# Altium PCB dym.PcbDoc
Units mm, origin at the board's own origin, x right, y up, seen from the top; angles counter-clockwise.
Board outline 40 x 20 mm, 2 copper layers (Top Layer, Bottom Layer); 20 components, 11 nets, 45 pads, 3 vias.
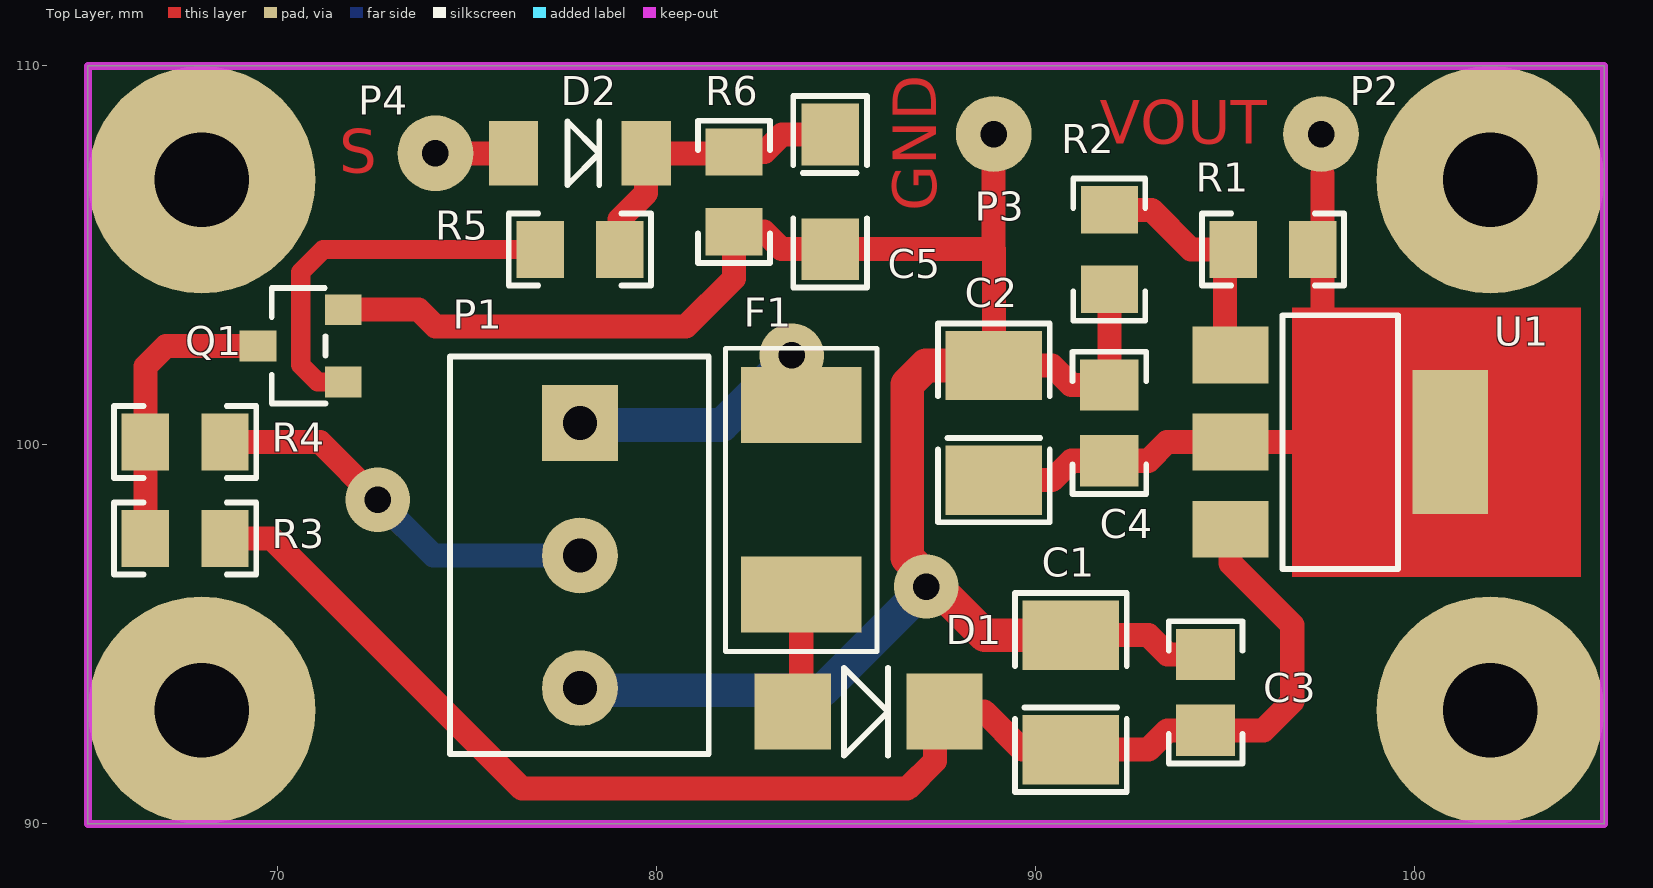
[diagram p0: Top Layer view]
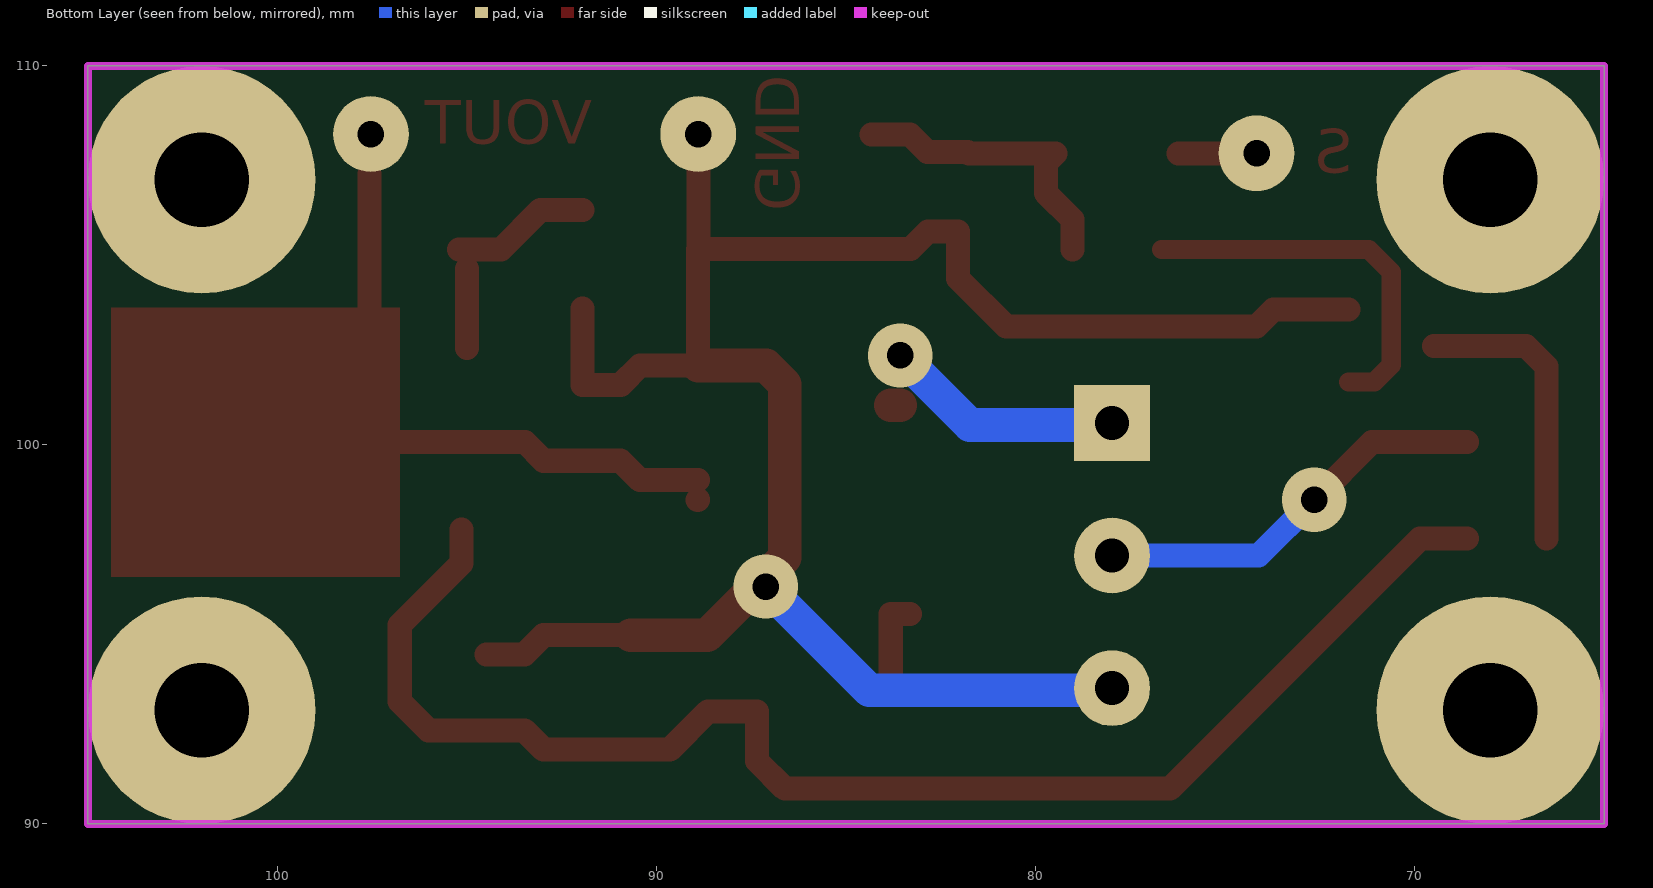
[diagram p1: Bottom Layer view, seen from below]

## Layer stack, top to bottom
Top Layer: signal copper 0.0356
Dielectric: dielectric 0.32, FR-4, Dk 4.8
Bottom Layer: signal copper 0.0356

## Board outline
65,90 105,90 105,110 65,110

## Design rules (kind name [scope] priority, off if disabled: settings)
Clearance [All] p1: gap=0.254
PolygonConnect [All] p1: connectstyle=Relief reliefconductorwidth=0.254 reliefentries=4 polygonreliefangle="90 Angle" airgapwidth=0.254
RoutingVias [All] p1: holewidth=0.7 width=1.6 viastyle="Through Hole" minholewidth=0.7 minwidth=1.6 maxholewidth=0.7 maxwidth=1.6
SolderMaskExpansion [All] p1: expansion=0.102
Width [All] p1: maxlimit=0.889 minlimit=0.508 preferedwidth=0.762 minimp=50.000000 maximp=50.000000 favimp=50.000000
28 further rules are at their usual default settings.

## Components (designator, comment, footprint, x,y, rotation, side; value= is the part's Value field where it differs from the comment)
C1 "10uF" TANC_B 90.932,93.472 r90 top
C2 "10uF" TANC_B 88.9,100.584 r90 top
C3 "100nF" C0805 94.488,93.472 r90 top
C4 "100nF" C0805 91.948,100.584 r90 top
C5 "1uF" TANC_A 84.582,106.68 r270 top
D1 "M4" SMA 85.598,92.964 r180 top
D2 "1N4148" DO-213A 77.978,107.696 r180 top
F1 "0679-0500-01" 0679-0500-01 83.82,98.552 r270 top
P1 "ARK 3-Pin" ARK-3.5mm-3pin 77.978,100.584 r270 top
P2 "2.5V" PAD 97.536,108.204 r0 top
P3 "GND" PAD 88.9,108.204 r0 top
P4 "SIG" PAD 74.168,107.696 r0 top
Q1 "2N7002" SOT23 70.612,102.616 r90 top
R1 "150R" R0805 96.266,105.156 r180 top
R2 "1K" R0805 91.948,105.156 r270 top
R3 "10K" R0805 67.564,97.536 r180 top
R4 "100R" R0805 67.564,100.076 r180 top
R5 "100R" R0805 77.978,105.156 r0 top
R6 "1M" R0805 82.042,106.68 r90 top
U1 "LD1117S-TR" SOT-223 98.044,100.076 r180 top

## Footprints (in the part's own frame and the unit in brackets; to place one, negate y for a bottom-side part, rotate by r counter-clockwise, add the part's x,y. Pads: shape width x height; smd on the part's side, far side on the other; paste and mask are expansions set on the pad)
0679-0500-01 [mm]
  rect 2x3.18 smd: 1(-2.5,0) 2(2.5,0)
  silkscreen extent -4,-2 4,2, body extent -3.05,-1.3 3.05,1.39, height 2.69
ARK-3.5mm-3pin [mm]
  rect 2x2 hole 0.9: 1(0,0)
  round 2 hole 0.9: 2(3.5,0) 3(7,0)
  silkscreen extent -1.75,-3.43 8.73,3.4, body extent -1.76,-3.43 8.74,3.47, height 2.1
C0805 [mm] "Chip Capacitor, Body 2.0x1.2mm, Height 1.3mm, IPC Low Density"
  rect 1.35x1.55 smd: 1(-1,0) 2(1,0)
  silkscreen extent -1.88,-0.97 1.88,0.97, body extent -1.1,-0.72 1.1,0.72, height 1.3
DO-213A [mm]
  rect 1.3x1.7 smd: 1(-1.75,0) 2(1.75,0)
  silkscreen extent -0.51,-0.84 0.33,0.84, body extent -1.75,-0.7 1.75,0.7, height 1.39
PAD [mm]
  round 2 hole 0.7: 1(0,0)
R0805 [mm] "Chip Resistor, Body 2.0x1.3mm, IPC Low Density"
  rect 1.25x1.5 smd: 1(-1.05,0) 2(1.05,0)
  silkscreen extent -1.88,-0.95 1.88,0.95, body extent -1.1,-0.67 1.1,0.67, height 0.7
SMA [mil]
  rect 79x79 smd: 1(-78.87,0) 2(78.87,0)
  silkscreen extent -20,-46 26,46, body extent -98,-53 98,53, height 87
SOT23 [mil]
  rect 32x38 smd: 1(-37.6,-44.33) 2(37.6,-44.33) 3(0,44.33)
  silkscreen extent -60,-26 60,30, body extent -57,-49 57,48, height 40
SOT-223 [mm]
  rect 2x1.5 smd: 1(2.9,-2.3) 2(2.9,0) 3(2.9,2.3)
  rect 2x3.8 smd: 2(-2.9,0)
  silkscreen extent -1.52,-3.35 1.52,3.35, body extent -3.5,-3.25 3.5,3.25, height 1.69
TANC_A [mil]
  rect 64x60 smd: 1(-59.53,0) 2(59.53,0)
  silkscreen extent -99,-38 99,38, body extent -64,-31 64,31, height 63
TANC_B [mil]
  rect 72x100 smd: 1(-59.53,0) 2(59.53,0)
  silkscreen extent -103,-58 103,58, body extent -69,-55 70,55, height 75

## Part data
C1 C2 C5: library part Cap_Pol, "Capacitor Polarized"
C3 C4: library part Cap, "Capacitor"
D1 D2: library part Diode
F1: "Bezpiecznik: topikowy; szybki; ceramiczny; 500mA; 125VAC; 125VDC"
P2 P3 P4: library part PAD, "PAD"
Q1: library part 2N7002(GSD), "N-MOSFET"
R1 R2 R3 R4 R5 R6: library part Res, "Resistor"
U1: "Stabilizator napiêcia; LDO, liniowy, regulowany; 1,25÷15V; 0,95A"

## Free pads (board coordinates)
  round 6 hole 2.5: M(68,93) M(68,107) M(102,93) M(102,107)

## Via types
v1: diameter 1.7, hole 0.7, Top Layer to Bottom Layer, 3 vias

## Nets (pads, with @x,y where several pads share a name; then routed paths per layer and width w, separated by ;. In a path a pad name is that pad's centre, name@x,y a point inside that pad or via, vN(x,y) a via of type N, cw(c..) or ccw(c..) an arc to the next point about the centre after c; other vN are vias at no path point)
9.8V: C2.1 C4.1 P2.1 R1.1 U1.2 | length 19.6
  Top Layer w0.635: C2.1@88.9,98.564 C2.1@88.912,98.552 ; C2.1 90.436,99.072 90.948,99.584 C4.1 92.98,99.584 93.472,100.076 95.144,100.076 97.536,100.076 ; 97.57,107.154 97.57,105.156 97.57,100.11 97.536,100.076 ; U1.2@100.944,100.076 97.536,100.076
12V: C1.1 C3.1 D1.1 R3.1 U1.3 | length 38.7
  Top Layer w0.635: R3.1 69.85,97.536 76.454,90.932 86.614,90.932 87.347,91.665 87.347,92.964 88.646,92.964 89.65,91.96 C1.1 92.976,91.96 93.488,92.472 C3.1 96.012,92.472 96.774,93.234 96.774,95.25 95.144,96.88 U1.3
GND: C1.2 C2.2 C3.2 C4.2 C5.2 P1.3 P3.1 Q1.2 R2.2 R6.1 | length 57
  Top Layer w0.635: Q1.2 73.721,103.571 74.168,103.124 80.772,103.124 82.042,104.394 R6.1 82.838,105.63 83.3,105.168 88.888,105.168 ; P3.1 88.888,108.192 88.888,105.168 ; C1.2@90.678,94.984 C1.2 92.976,94.984 93.488,94.472 C3.2 ; R2.2@91.948,103.598 C4.2 91.944,101.588 90.944,101.588 90.436,102.096 C2.2 88.9,105.156 88.888,105.168
  Top Layer w0.889: C2.2 87.11,102.096 86.614,101.6 86.614,97.028 88.658,94.984 C1.2@90.678,94.984
  Bottom Layer w0.889: P1.3@77.978,93.528 84.384,93.528 v1(87.122,96.266)
NetC5_1: C5.1 D2.1 R5.2 R6.2 | length 8
  Top Layer w0.635: R5.2 79.028,105.952 79.728,106.652 79.728,107.442 79.474,107.696 D2.1 81.754,107.696 81.788,107.73 82.85,107.73 83.312,108.192 C5.1@84.328,108.192
NetD1_2: D1.2 F1.2 | length 2.6
  Top Layer w0.635: F1.2@83.312,95.544 83.82,95.544 D1.2@83.82,93.472
NetD2_2: D2.2 P4.1 | length 2.1
  Top Layer w0.635: P4.1 D2.2
NetF1_1: F1.1 P1.1 | length 7
  Top Layer w0.889: F1.1@83.566,101.052 F1.1 ; v1(83.566,102.362) v1@83.82,102.108
  Bottom Layer w0.889: P1.1@77.978,100.528 81.732,100.528 v1(83.566,102.362)
NetQ1_1: Q1.1 R5.1 | length 10.1
  Top Layer w0.508: Q1.1 71.059,101.661 70.612,102.108 70.612,104.561 71.207,105.156 R5.1@76.674,105.156
NetQ1_3: Q1.3 R3.2 R4.2 | length 7.7
  Top Layer w0.635: R3.2 R4.2 66.514,102.074 67.056,102.616 Q1.3
NetR1_2: R1.2 R2.1 U1.1 | length 5.8
  Top Layer w0.635: R2.1 93.057,106.206 94.107,105.156 R1.2 ; U1.1@94.996,102.558 R1.2@94.996,104.648
OUT: P1.2 R4.1 | length 10.6
  Top Layer w0.635: R4.1 71.12,100.076 v1(72.644,98.552)
  Bottom Layer w0.635: v1(72.644,98.552) 74.112,97.084 P1.2

## Keep-outs
Keep-Out Layer:
  the board outline again, w0.2

## Other copper
Top Layer:
  rectangle net 9.8V: 96.774,96.52 104.394,103.632
  text "VOUT" at 91.694,107.95 h1.14
  text "S" at 71.628,107.188 h1.14
  text "GND" at 87.376,106.172 h1.14 r90